# Altium PCB PCB1.PcbDoc
Units mil, origin at the board's own origin, x right, y up, seen from the top; angles counter-clockwise.
Board outline 6000 x 4011.54 mil, 2 copper layers (Top Layer, Bottom Layer); 32 components, 36 nets, 174 pads, 38 vias.
Unrouted connection lines stored in the file: 20.
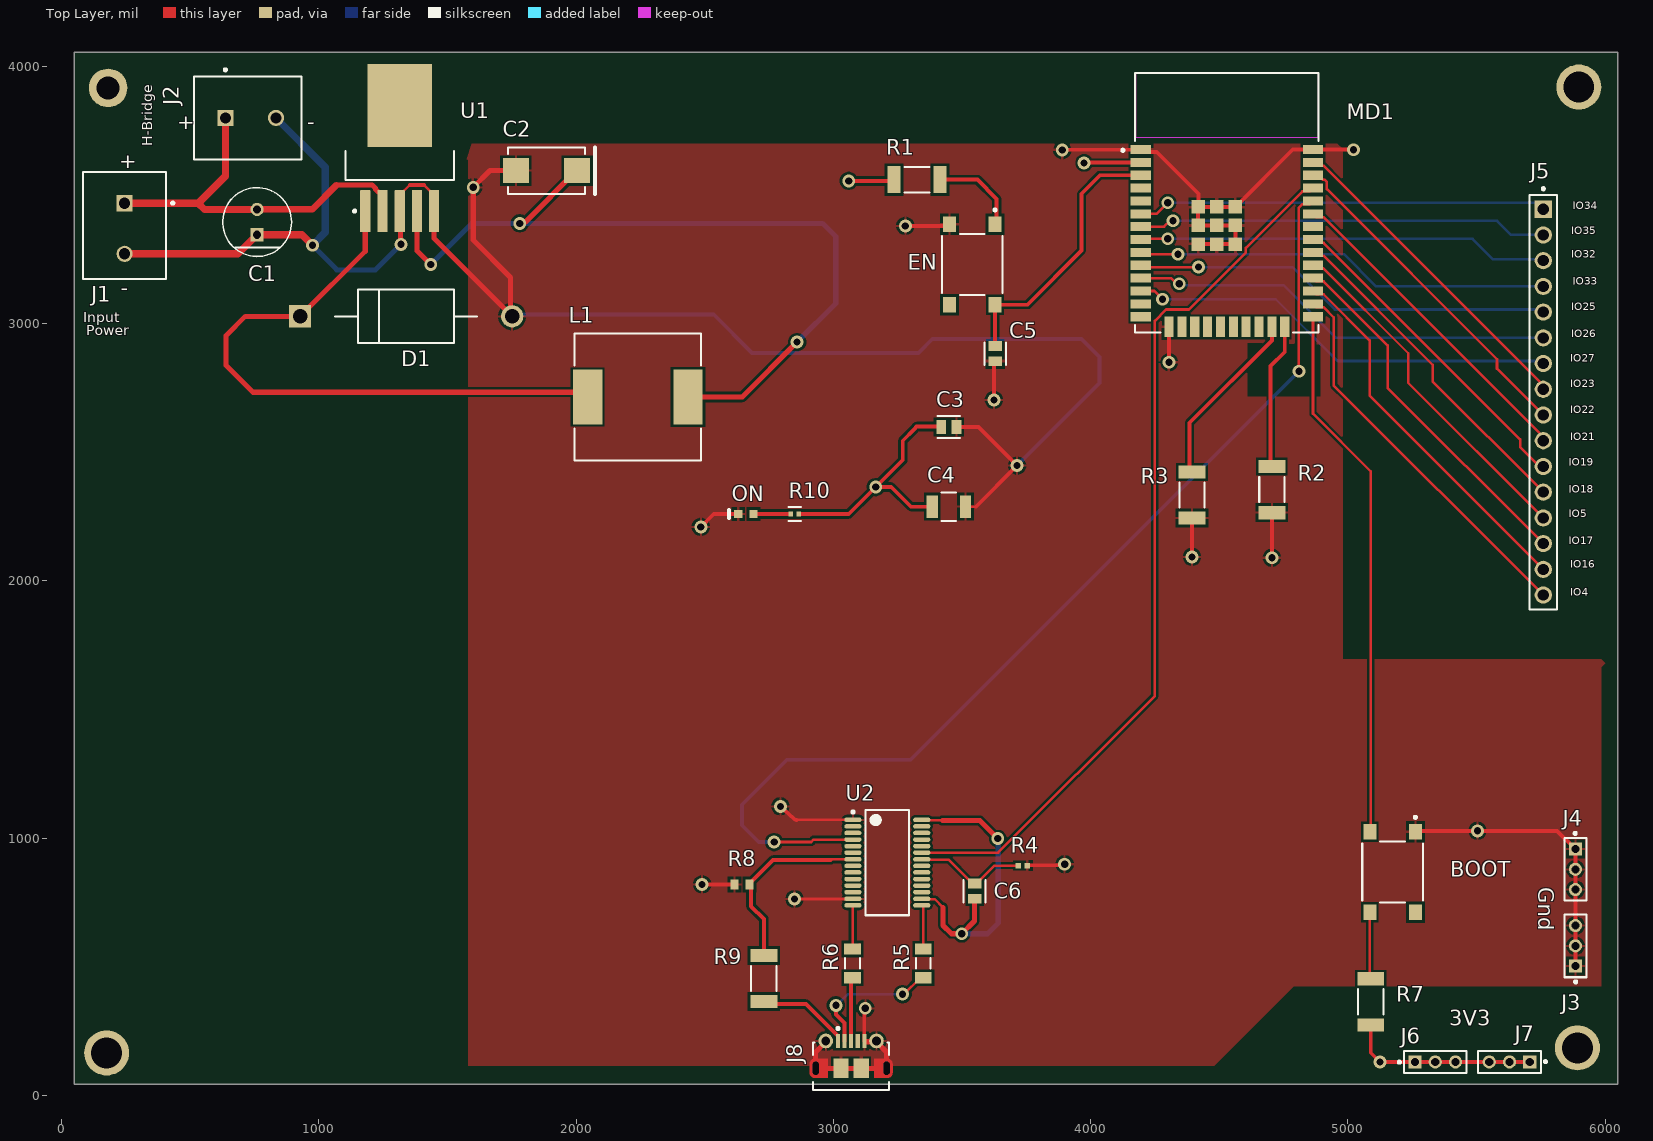
[diagram p0: Top Layer view]
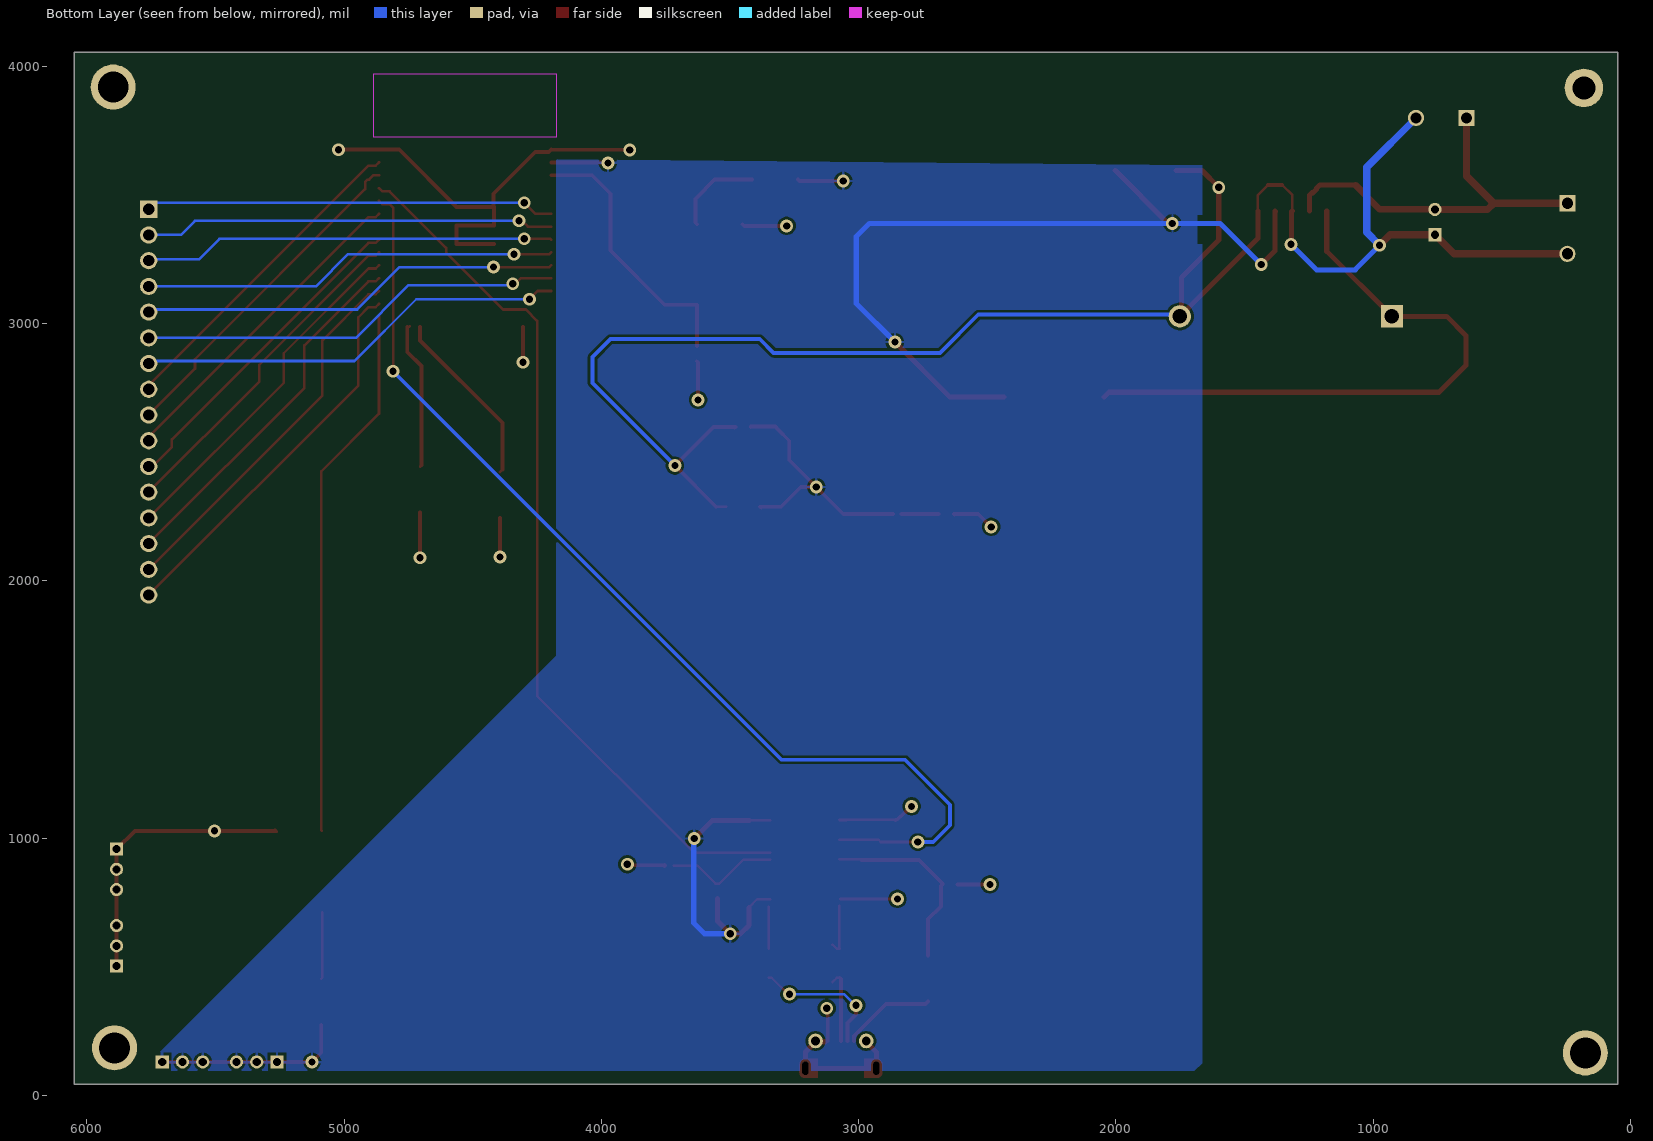
[diagram p1: Bottom Layer view, seen from below]
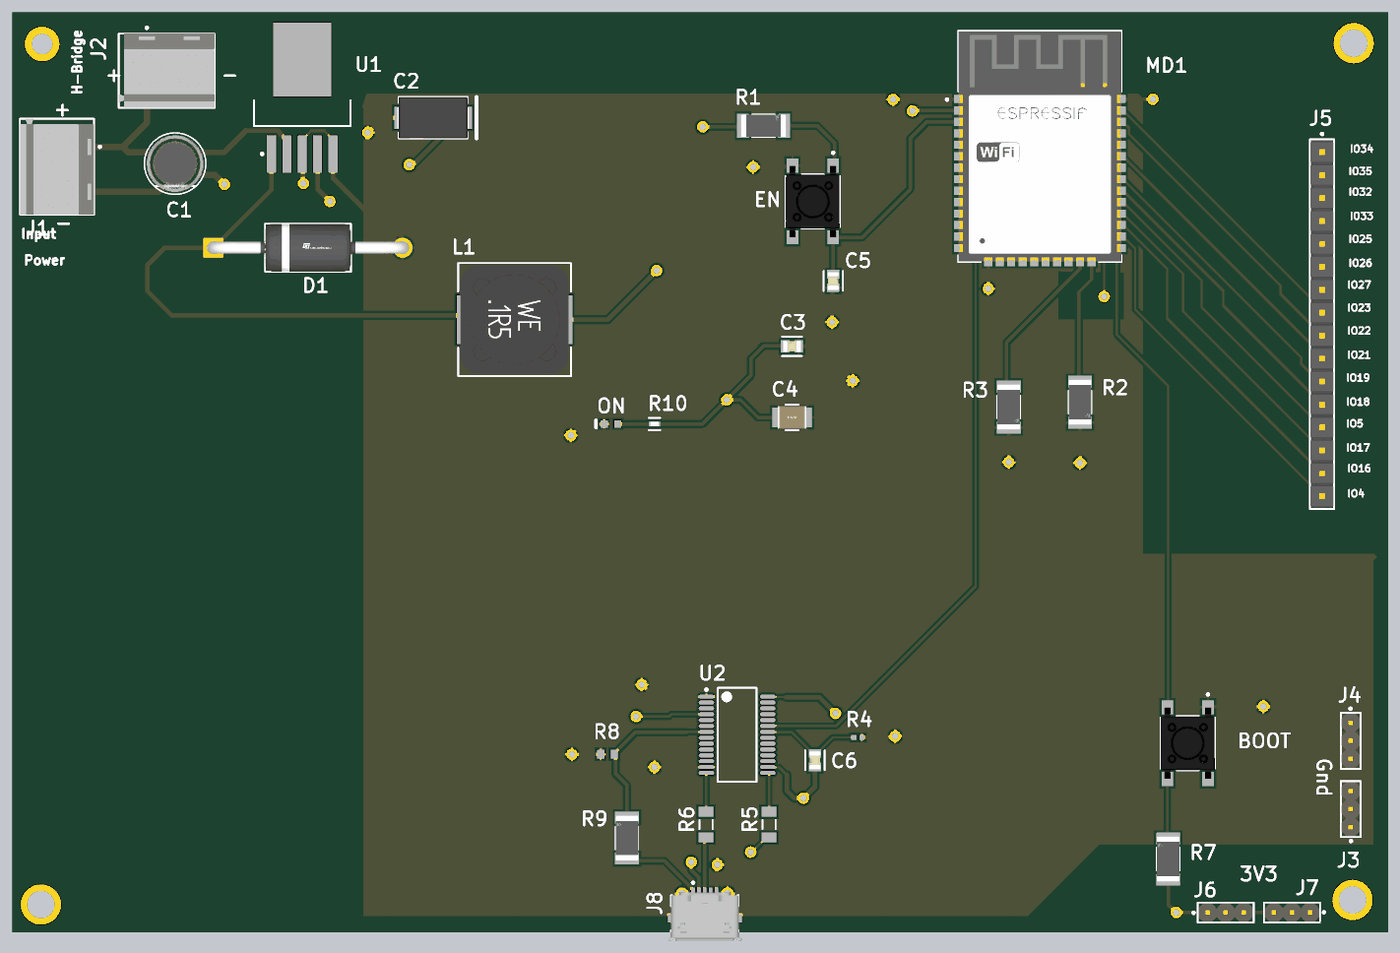
[diagram p2: 3D render of the assembled board from above, using the file's embedded part models]

## Layer stack, top to bottom
Top Solder: solder mask 0.4, Solder Resist, Dk 3.5
Top Layer: signal copper 1.4
Dielectric 1: dielectric 12.6, FR-4, Dk 4.8
Bottom Layer: signal copper 1.4
Bottom Solder: solder mask 0.4, Solder Resist, Dk 3.5

## Board outline
49.32,43.46 6049.32,43.46 6049.32,4055 49.32,4055

## Design rules (kind name [scope] priority, off if disabled: settings)
Clearance [All] p1: gap=10 ignorepadtopadclearanceinfootprint=TRUE except(0: Arc-Hole Track-Hole SMDPad-Hole THPad-Hole Via-Hole Fill-Hole Poly-Hole Region-Hole Text-Hole)
HoleSize [All] p1: absolutevalues=TRUE maxlimit=150 minlimit=1 maxpercent=80.000 minpercent=20.000
MinimumSolderMaskSliver [All] p1: minsoldermaskwidth=1
PolygonConnect [All] p1: connectstyle=Relief reliefconductorwidth=10 reliefentries=4 polygonreliefangle="90 Angle" airgapwidth=10
RoutingVias [All] p1: holewidth=28 width=50 viastyle="Through Hole" minholewidth=28 minwidth=50 maxholewidth=28 maxwidth=50
SilkToSolderMaskClearance [IsPad] p1: minsilkscreentomaskgap=5 clearancetoexposedcopper=TRUE
SolderMaskExpansion [All] p1: expansion=4 istentingtop=FALSE
Width [All] p1: maxlimit=30 minlimit=10 preferedwidth=10
27 further rules are at their usual default settings.

## Classes and differential pairs
component class Schematic_Capstone: BOOT C1 C2 C3 C4 C5 C6 D1 EN J1 J4 J5 J6 J7 J8 L1 MD1 ON R1 R2 R3 R4 R5 R6 R7 R8 R9 R10 U1 U2

## Components (designator, comment, footprint, x,y, rotation, side; value= is the part's Value field where it differs from the comment)
BOOT "PTS645SM43SMTR92LFS" FP-PTS645SM43SMTR92LFS-MFG 5174.32,868.46 r270 top
C1 "220 uF" FP-860010473011-MFG 760,3395 r90 top
C2 "100 uF" VISH-7343-31_N 1885,3595 r180 top
C3 "100 nF" FP-C0805C-DN-MFG 3449.32,2598.46 r0 top value="0.10 μF"
C4 "10 uF" FP-C3225-250-0_45-MFG 3449.32,2288.46 r0 top
C5 "100 nF" FP-C0805C-DN-MFG 3629.32,2883.46 r270 top value="0.10 μF"
C6 "100 nF" FP-C0805C-DN-MFG 3549.32,793.94 r90 top value="0.10 μF"
D1 "1N5822" FP-DO-201AD-MFG 1339.32,3028.46 r0 top
EN "PTS645SM43SMTR92LFS" FP-PTS645SM43SMTR92LFS-MFG 3540,3230 r270 top
J1 "282836-2" TECO-282836-2_V 245,3370 r270 top
J2 "282836-2" TECO-282836-2_V 735,3800 r0 top
J3 "951103-8622-AR" FP-951103-8622-AR-MFG 5885,581.26 r90 top
J4 "951103-8622-AR" FP-951103-8622-AR-MFG 5885,878.74 r270 top
J5 "61301611121" FP-61301611121-MFG 5760,2695 r270 top
J6 "951103-8622-AR" FP-951103-8622-AR-MFG 5340,130 r0 top
J7 "951103-8622-AR" FP-951103-8622-AR-MFG 5628.74,130 r180 top
J8 "105017-0001" USB-MICRO-B_V 3069.32,158.46 r0 top
L1 "68 uH" WE-PD-L 2240,2715 r0 top
MD1 "ESP32-WROOM-32D" FP-ESP32-WROOM-32D-MFG 4530,3470 r0 top
ON "HSMH-C190" AVAG-HSMX-C190_V 2660,2260 r180 top (schematic designator DS1)
R1 "10 K" FP-CRCW2010-e3-IPC_B 3325,3560 r0 top
R2 "10K" FP-CRCW2010-e3-IPC_B 4705,2355 r270 top
R3 "10K" FP-CRCW2010-e3-IPC_B 4394.32,2333.86 r270 top
R4 "1K" RESC1005X40X25NL05T05 3736.6,893.46 r0 top
R5 "27 R" RESC3216X70X50NL05T20 3349.32,513.46 r90 top
R6 "27 R" RESC3216X70X50NL05T20 3074.32,513.46 r270 top
R7 "10 K" FP-CRCW2010-e3-IPC_B 5089.32,363.46 r90 top
R8 "20 K" RESC1608X55X25ML10T15 2645,820 r180 top
R9 "10 K" FP-CRCW2010-e3-IPC_B 2730,454.61 r90 top
R10 "100 R" FP-CRCW0402-e3-IPC_C 2850,2260 r0 top
U1 "LM2595S-3.3/NOPB" KTT0005B_N 1314.32,3683.46 r90 top
U2 "CY7C64225-28PVXC" CYP-PVX28_L 3210,905 r0 top

## Footprints (in the part's own frame and the unit in brackets; to place one, negate y for a bottom-side part, rotate by r counter-clockwise, add the part's x,y. Pads: shape width x height; smd on the part's side, far side on the other; paste and mask are expansions set on the pad)
AVAG-HSMX-C190_V [mm] "SMD, 2-Leads, Body 1.6x0.8mm, Height 0.9mm"
  rect 0.8x0.8 smd: 1(-0.75,0) 2(0.75,0)
  silkscreen extent 1.65,-0.4 1.65,0.4, body extent -0.8,-0.4 0.8,0.4, height 0.9
CYP-PVX28_L [mm] "SOP, 28-Leads, Body 10.2x5.3mm, Pitch 0.65mm, IPC High Density"
  oval 1.7x0.45 smd: 1(-3.4,4.225) 2(-3.4,3.575) 3(-3.4,2.925) 4(-3.4,2.275) 5(-3.4,1.625) 6(-3.4,0.975) 7(-3.4,0.325) 8(-3.4,-0.325) 9(-3.4,-0.975) 10(-3.4,-1.625) 11(-3.4,-2.275) 12(-3.4,-2.925) 13(-3.4,-3.575) 14(-3.4,-4.225) 15(3.4,-4.225) 16(3.4,-3.575) 17(3.4,-2.925) 18(3.4,-2.275) 19(3.4,-1.625) 20(3.4,-0.975) 21(3.4,-0.325) 22(3.4,0.325) 23(3.4,0.975) 24(3.4,1.625) 25(3.4,2.275) 26(3.4,2.925) 27(3.4,3.575) 28(3.4,4.225)
  silkscreen extent -3.52,-5.2 2.15,5.2, body extent -2.8,-5.2 2.8,5.2, height 2
FP-951103-8622-AR-MFG [mm]
  rect 1.3x1.3 hole 0.8 paste-1000 mask+0: 1(-2,0)
  round 1.3 hole 0.8 paste-1000 mask+0: 2(0,0) 3(2,0)
  silkscreen extent -3.67,-1.1 3.1,1.1, body extent -3.2,-1.2 3.2,1.2, height 0.25
FP-61301611121-MFG [mm]
  rect 1.7x1.7 hole 1.1 paste-1000 mask+0: 1(-19.05,0)
  round 1.7 hole 1.1 paste-1000 mask+0: 2(-16.51,0) 3(-13.97,0) 4(-11.43,0) 5(-8.89,0) 6(-6.35,0) 7(-3.81,0) 8(-1.27,0) 9(1.27,0) 10(3.81,0) 11(6.35,0) 12(8.89,0) 13(11.43,0) 14(13.97,0) 15(16.51,0) 16(19.05,0)
  silkscreen extent -21.19,-1.35 20.47,1.35, body extent -20.57,-1.45 20.57,1.45, height 0.25
FP-860010473011-MFG [mm]
  rect 1.3x1.3 hole 0.8 paste-1000 mask+0: 1(-1.25,0)
  round 1.3 hole 0.8 paste-1000 mask+0: 2(1.25,0)
  silkscreen extent -3.4,-3.4 3.4,3.4, body extent -3.5,-3.5 3.5,3.5, height 0.25
FP-C0805C-DN-MFG [mm]
  rect 0.95x1.35 smd paste+0 mask+0: 1(-0.75,0) 2(0.75,0)
  silkscreen extent -1.1,-1.07 1.1,1.07, body extent -1.4,-0.85 1.4,0.85, height 0.25
FP-C3225-250-0_45-MFG [mm]
  rect 1.1x2.2 smd paste+0 mask+0: 1(-1.65,0) 2(1.65,0)
  silkscreen extent -0.72,-1.43 0.72,1.43, body extent -2.3,-1.53 2.3,1.53, height 0.25
FP-CRCW0402-e3-IPC_C [mil]
  rect 18.43x18.6 smd paste+0 mask+0: 1(-15.83,0) 2(15.83,0)
  silkscreen extent -25,-27 25,27, body extent -29,-15 29,15, height 10
FP-CRCW2010-e3-IPC_B [mil]
  rect 51.42x104.65 smd paste+0 mask+0: 1(-89.61,0) 2(89.61,0)
  silkscreen extent -49,-49 49,49, body extent -125,-62 125,62, height 10
FP-DO-201AD-MFG [mm]
  rect 2.2x2.2 hole 1.45 paste-1000 mask+0: 1(-10.47,0)
  round 2.2 hole 1.45 paste-1000 mask+0: 2(10.47,0)
  silkscreen extent -7,-2.65 7,2.65, body extent -11.67,-2.75 11.67,2.75, height 0.25
FP-ESP32-WROOM-32D-MFG [mm]
  rect 2x0.9 smd paste+0 mask+0: 1(-8.5,5.26) 2(-8.5,3.99) 3(-8.5,2.72) 4(-8.5,1.45) 5(-8.5,0.18) 6(-8.5,-1.09) 7(-8.5,-2.36) 8(-8.5,-3.63) 9(-8.5,-4.9) 10(-8.5,-6.17) 11(-8.5,-7.44) 12(-8.5,-8.71) 13(-8.5,-9.98) 14(-8.5,-11.25) 25(8.5,-11.25) 26(8.5,-9.98) 27(8.5,-8.71) 28(8.5,-7.44) 29(8.5,-6.17) 30(8.5,-4.9) 31(8.5,-3.63) 32(8.5,-2.36) 33(8.5,-1.09) 34(8.5,0.18) 35(8.5,1.45) 36(8.5,2.72) 37(8.5,3.99) 38(8.5,5.26)
  rect 0.9x2 smd paste+0 mask+0: 15(-5.715,-12.25) 16(-4.445,-12.25) 17(-3.175,-12.25) 18(-1.905,-12.25) 19(-0.635,-12.25) 20(0.635,-12.25) 21(1.905,-12.25) 22(3.175,-12.25) 23(4.445,-12.25) 24(5.715,-12.25)
  rect 1.33x1.33 smd paste+0 mask+0: 39(-2.835,-4.075) 39(-2.835,-2.24) 39(-2.835,-0.405) 39(-1,-4.075) 39(-1,-2.24) 39(-1,-0.405) 39(0.835,-4.075) 39(0.835,-2.24) 39(0.835,-0.405)
  Keep-Out Layer region: -9,6.45 9,6.45 9,12.75 -9,12.75
  Keep-Out Layer region: -9,6.45 9,6.45 9,12.75 -9,12.75
  silkscreen extent -10.4,-12.8 9.05,12.8, body extent -9.6,-13.35 9.6,12.9, height 0.25
FP-PTS645SM43SMTR92LFS-MFG [mm]
  rect 1.55x1.3 smd paste+0 mask+0: 1(-3.975,2.25) 2(3.975,2.25) 3(-3.975,-2.25) 4(3.975,-2.25)
  silkscreen extent -5.52,-3 3,3, body extent -4.85,-3.1 4.85,3.1, height 0.25
KTT0005B_N [mm] "DPAK, 5-Leads, Body 10.65x9.65mm, Pitch 1.7mm, IPC Medium Density"
  rrect10% 4.15x1 smd: 1(-6.25,3.4) 2(-6.25,1.7) 3(-6.25,0) 4(-6.25,-1.7) 5(-6.25,-3.4)
  rrect2% 8.2x6.4 smd: 6(4.2,0)
  silkscreen extent -6.37,-5.35 -0.3,5.35, body extent -3.15,-5.32 6.5,5.33, height 4.83
RESC1005X40X25NL05T05 [mm] "Chip Resistor, 2-Leads, Body 1.00x0.50mm, IPC Medium Density"
  rect 0.55x0.55 smd: 1(-0.45,0) 2(0.45,0)
  body extent -0.53,-0.27 0.53,0.28, height 0.4
RESC1608X55X25ML10T15 [mm] "Chip Resistor, 2-Leads, Body 1.60x0.80mm, IPC Low Density"
  rect 0.8x1 smd: 1(-0.75,0) 2(0.75,0)
  body extent -0.85,-0.45 0.85,0.45, height 0.55
RESC3216X70X50NL05T20 [mm] "Chip Resistor, 2-Leads, Body 3.20x1.60mm, IPC Medium Density"
  rect 1.1x1.65 smd: 1(-1.425,0) 2(1.425,0)
  silkscreen extent -0.5,-0.72 0.5,0.72, body extent -1.63,-0.82 1.62,0.82, height 0.7
TECO-282836-2_V [mm] "Female Header, Pitch 5mm, 1 x 2 Position, Height 10mm"
  rect 1.6x1.6 hole 1.1: 1(-2.5,0)
  round 1.6 hole 1.1: 2(2.5,0)
  silkscreen extent -5.6,-4.1 5,4.88, body extent -5.6,-4.1 5,4.1, height 10
USB-MICRO-B_V [mm] "USB, MICRO B, Body 7.491x4.695 mm, Pitch 0.65 mm"
  rect 0.4x1.35 smd: 1(-1.3,1.35) 2(-0.65,1.35) 3(0,1.35) 4(0.65,1.35) 5(1.3,1.35)
  round 1.45 hole 0.85: 6(-2.5,1.35) 7(2.5,1.35)
  rrect50% 0x0 hole 0.6 slot 1.3 at 90 deg: 8(-3.5,-1.35) 11(3.5,-1.35)
  rect 1.5x1.9 smd: 9(-1,-1.35) 10(1,-1.35)
  Top Layer circle w0.5: c3.6,-1.8 r0.25
  Top Layer circle w0.5: c-3.6,-1.8 r0.25
  Top Layer region: 3.6,-0.9 3.6,-1.8 4.1,-1.8 4.1,-0.9
  Top Layer region: 2.3,-0.4 2.3,-2.3 3.6,-2.3 3.6,-0.4
  Top Layer region: -2.3,-2.3 -2.3,-0.4 -3.6,-0.4 -3.6,-2.3
  Top Layer region: -3.6,-1.8 -3.6,-0.9 -4.1,-0.9 -4.1,-1.8
  Top Layer lines w0.5: -3.6,-0.65 cw(c-3.6,-0.9) -3.5,-0.671 cw(c-3.6,-0.9) -3.5,-1.129 cw(c-3.6,-0.9) -3.6,-0.65 ; 3.5,-1.129 cw(c3.6,-0.9) 3.5,-0.671 cw(c3.6,-0.9) 3.6,-0.65 cw(c3.6,-0.9) 3.5,-1.129
  silkscreen extent -3.75,-3.5 3.75,2.7, body extent -4.1,-3.9 4.1,1.5, height 2.67
VISH-7343-31_N [mm] "Molded Capacitor, 2-Leads, Body 7.6x4.6mm, IPC Medium Density"
  rect 2.55x2.45 smd: 1(-3.025,0) 2(3.025,0)
  silkscreen extent -4.8,-2.3 3.8,2.3, body extent -4.02,-2.3 4.02,2.3, height 3.1
WE-PD-L [mm] "SMD Inductor, 2-Leads, Body 12.0 x 12.0 mm"
  rect 2.9x5.4 smd: 1(-4.95,0) 2(4.95,0)
  silkscreen extent -6.25,-6.25 6.25,6.25, body extent -6,-6 6,6, height 5.98

## Part data
BOOT EN: library part CMP-2000-05160-2, "SWITCH TACTILE SPST-NO 0.05A 12V", Case/Package=SMD/SMT, Color=Black, Contact Resistance=100mR, Current Rating=50mA, Max Operating Temperature=60°C, Max Voltage Rating (DC)=12V, Min Operating Temperature=-20°C, Operating Force=160gf, Package Quantity=1, Actuator Length=0.85mm, Actuator Material=Nylon, Actuator Type=Standard, Contact Material=Silver, Contact Plating=Silver, Depth=9mm, Illumination Type=Non-Illuminated, Lead Free="Lead Free", Length=6mm, Max Current Rating=50mA, Mechanical Life=100000Cycles, Mount="Surface Mount", Orientation=Straight, Packaging="Tape and Reel", REACH SVHC="No SVHC", Switch Function=Off-Mom, Termination="Gull Wing", Throw Configuration=SPST, Voltage Rating (DC)=12V
C1: library part CMP-207834-000007-1, "CAP 220 UF 20% 25 V", Capacitance=220uF, Case/Package=Radial, Max Operating Temperature=85°C, Min Operating Temperature=-40°C, Package Quantity=1500, Ripple Current=310mA, Tolerance=20%, Voltage Rating=25V, Diameter=6.3mm, Height=11mm, Height - Seated (Max)=0.492inch, Lead Pitch=0.098inch, Life (Hours)=2000Hour, Material=Aluminium, Mount="Through Hole", Packaging="Tape and Reel", Polarity=Polar, RoHS Compliant=Yes, Series=WCAP-ATG8, Voltage Rating (DC)=25V
C2: library part CMP-1666-00024-1, "Solid Tantalum Chip Capacitor, 100 uF, +/- 10%, 10 V, -55 to 125 degC, 2917 (7343 Metric), RoHS, Tape and Reel", Case Code (Imperial)=0603, Case Code (Metric)=1608, Max Operating Temperature="155 degC", Min Operating Temperature="-55 degC", Package Quantity=200, Power Rating="100 mW", Resistance="1.2 kohm", Tolerance=1%, Voltage Rating="50 V", Case\Package=0603, ComponentLink1Description="Manufacturer URL", ComponentLink1URL=http://www.vishay.com/, ComponentLink2Description=Datasheet, ComponentLink2URL=http://www.vishay.com/docs/40002/293d.pdf, DatasheetVersion=Aug-16, Height="0.45 mm", Length="1.6 mm", Mount="Surface Mount", PackageDescription="2-Pin Surface Mount Device, Body 7.3 x 4.3 mm", PackageReference=7343-31, Packaging="Tape and Reel", Pins=2, REACH SVHC="No SVHC", RoHSCompliant=true, Voltage Rating (DC)="50 V", Width="0.8 mm"
C3 C5 C6: library part CMP-2007-00279-2, "CAP CER 0.1UF 50V X7R 0805", Capacitance="0.10 μF", Manufacturer=KEMET, Manufacturer Part Number=C0805C104K5RACTU, Package=C0805C-DN, Temperature="-55°C to +125°C", Temperature Characteristic=X7R, Temperature Coefficient=30ppm/°C, Temperature Range High=+125°C, Temperature Range Low=-55°C, Tolerance=0.1, Voltage Rating="50 V", Automotive=No, Category=Cap, ComponentLink2Description=Datasheet, ComponentLink2URL=https://content.kemet.com/datasheets/KEM_C1003_C0G_SMD.pdf, Device Class L1="Passive Components", Device Class L2=Capacitors, Device Class L3="Ceramic Capacitors", Digikey Description="CAP CER 0.1UF 50V X7R 0805", Height=0.88mm, Ipc Land Pattern Name=CAPC200125X78, Lead Free=Yes, Material=Ceramic, Mouser Description="Cap Ceramic 0.1uF 50V X7R 10% SMD 2.0 x 1.2 mm 125 C Paper T/R", Octopart=https://octopart.com/c0805c104k5ractu-kemet-143926, RoHS=TRUE
C4: library part CMP-08246-007262-1, "COMMERCIAL GRADE GENERAL PURPOSE"
D1: library part CMP-12187-000025-1, "DIODE SCHOTTKY 40V 3A DO201AD", Forward Current=3A, Manufacturer=STMicroelectronics, Max Junction Temp=+150°C, Max Repetitive Reverse Voltage=40V, Max Surge Forward Current=80A, Package=DO-201AD, Peak Reverse Current=2mA, Temperature="to +150°C", Automotive=No, Category=Diode, ComponentLink2Description=Datasheet, ComponentLink2URL=https://www.st.com/resource/en/datasheet/1n5822.pdf, Device Class L1="Discrete Semiconductors", Device Class L2=Diodes, Device Class L3="Schottky Diodes", Digikey Description="DIODE SCHOTTKY 40V 3A DO201AD", Height=5.3mm, Lead Free=Yes, Manufacturer Part Number=1N5822, Mouser Description="Schottky Diodes & Rectifiers Vr/40V Io/3A BULK", Octopart=https://octopart.com/1n5822-stmicroelectronics-323225, RoHS=TRUE, Temperature Range High=+150°C
J1 J2: library part CMP-1684-00017-1, "Female Header, Pitch 5 mm, 1 x 2 Position, Height 10 mm, Tail Length 3.5 mm, Rohs, Bulk", Color=Green, Current=13.5A, Manufacturer="TE Connectivity", Package Description="Female Header, Pitch 5 mm, 1 x 2 Position, Height 10 mm, Tail Length 3.5 mm", Package Reference=THD, Standard Package=300, Voltage=300V, 3D Model=282836-2.pdf, Category=Connectors,Interconnects, Clamp Material - Plating=Brass-NickelPlated, Contact Material - Plating=Brass-TinPlated, Datasheet URL=http://www.te.com.cn/commerce/DocumentDelivery/DDEController?Action=showdoc&DocId=Catalog+Section%7F1308389_EUROSTYLE_TERMINAL_BLOCKS%7F0607%7Fpdf%7FEnglish%7FENG_CS_1308389_EUROSTYLE_TERMINAL_BLOCKS_0607.pdf%7F282836-2, Dynamic Catalog=BuchananSeries, Family=TerminalBlocks-WiretoBoard, Featured Product=EurostyleTerminalBlockConnectors, Features=Interlocking(Side), Housing Material=Polyamide(PA66),Nylon6/6, Manufacturer URL=http://www.te.com, Mating Orientation=HorizontalwithBoard, Mounting Type=ThroughHole, Number of Levels=1, Other Names="5ULV-02B / A98076", Packaging=Bulk, Pitch="0.197\"(5.00mm)", Positions Per Level=2, Product Training Modules=Wire-to-BoardEurostyleTerminalBlocks, RoHS Information=282836-2StatementofCompliance, Screw Material - Plating=Brass-NickelPlated, Screw Thread=M3, Series=Buchanan, Torque - Screw=0.68Nm(6Lb-In), Wire Gauge=16-30AWG, Wire Termination=Screw-RisingCageClamp
J3 J4 J6 J7: library part CMP-05379-000003-1, "CONN HEADER VERT 3POS 2MM", Current Rating=2A, Manufacturer=3M, Temperature="-55°C to +125°C", Temperature Range High=+125°C, Temperature Range Low=-55°C, Automotive=No, Category=Conn, ComponentLink2Description=Datasheet, ComponentLink2URL=http://multimedia.3m.com/mws/media/1400506O/3m-pin-strip-header-951-series-78-5100-2653-3.pdf, Conn Gender=Male, Conn Orientation=Straight, Contact Material=Gold,Nickel, Device Class L1=Connectors, Device Class L2="Headers and Wire Housings", Device Class L3=unset, Digikey Description="CONN HEADER VERT 3POS 2MM", Height=6.3mm, Lead Free=Yes, Manufacturer Part Number=951103-8622-AR, Mouser Description="Header; PinStrip; CopperAlloy; HighTempThermoplastic; 3Cnts; 1A; RtAngle; 951Series", Number of Contacts=3, Number of Rows=1, Octopart=https://octopart.com/951103-8622-ar-3m-14400669, Package=951103-8622-AR, Pitch=2mm, RoHS=TRUE
J5: library part CMP-1502-01095-2, "CONN HEADER VERT 16POS 2.54MM", Color=Black, Flammability Rating="UL94 V-0", Max Operating Temperature=105°C, Min Operating Temperature=-40°C, Voltage Rating=250V, Connector Type=Header, Contact Finish - Mating=GOLD, Contact Material="Copper Alloy", Contact Mating Length=0.236inch, Contact Plating=Gold, Contact Shape=Square, Contact Type="Male Pin", Fastening Type=Pull, Gender=Male, Insulation Color=Black, Insulation Material=Nylon, Mount="Through Hole", Number of Contacts=16, Number of Positions=16, Number of Rows=1, Packaging=Bulk, Pitch=0.1inch, RoHS Compliant=Yes, Series=WR-PHD, Termination=Solder
J8: library part CMP-2000-05827-1, "Micro-USB B Receptacle, Right Angle, Bottom Mount, Surface Mount, with Solder Tabs, -30 to 85 degC, 5-Pin USB, RoHS, Tape and Reel", Manufacturer=Molex, Package Description="5-Leads USB, Micro B, Body 7.5 x 5 mm, Pitch 0.65 mm", Package Reference=MICRO-B, Package Version="Rev. F, 12/2012", Standard Package=1, Voltage - Max=30V, 3D Model=105017-0001.stp, Catalog Drawings=1050170001, Category=Connectors,Interconnects, Circuits=5, Connector Type=USB-microB, Datasheet URL=http://www.molex.com/elqNow/elqRedir.htm?ref=http://www.molex.com/webdocs/datasheets/pdf/en-us/1050170001_IO_CONNECTORS.pdf, Datasheet Version=03/2016, Family=USB,DVI,HDMIConnectors, Featured Product=Micro-USBConnectorsUSBConnectors, Features=Shielded,SolderRetention, Gender=Receptacle, Ingress Protection=-, Manufacturer URL=http://www.molex.com/, Mating Products=WM17145-ND-CABLEMICROUSBBTOSTDA1.0MWM17147-ND-CABLEMICROUSBBTOSTDA2.0MWM17146-ND-CABLEMICROUSBBTOSTDA1.5M, Mounting Technology=SurfaceMount, Mounting Type=BoardCutout,SurfaceMount,RightAngle, Number of Contacts=5, Online Catalog=Molex-MicroUSB, Other Names=WM1399DKR, Package URL=http://www.molex.com/pdm_docs/sd/1050170001_sd.pdf, Packaging=Digi-Reel®, PCN Assembly/Origin=ResinSupplier21/Oct/2015, RoHS Information=1050170001CertofCompliance, Series=-, Specifications=-
L1: library part CMP-0227-00736-1, "SMD-Shielded Power Inductor WE-PD, L = 68.0 µH", Inductance="68.0 ÂµH", ComponentLink1Description="Manufacturer Link", ComponentLink1URL=http://www.we-online.com, ComponentLink2Description=Datasheet, ComponentLink2URL=http://www.we-online.de/katalog/media/pdf/744771168.pdf, DatasheetVersion="ver 6, Jun-2005", PackageDescription="SMD Inductor, 2-Leads, Body 12.0 x 12.0 mm", PackageReference=WE-PD-L, PackageVersion=2006
MD1: library part CMP-194065-000003-1, "WIFI MODULE 32MBITS SPI FLASH", Manufacturer="Espressif Systems", Max Frequency=2484MHz, Max Supply Voltage=3.6V, Min Supply Voltage=3V, Nominal Supply Current=500mA, Temperature="-40°C to +85°C", Temperature Range High=+85°C, Temperature Range Low=-40°C, Automotive=No, Bandwidth=72MHz, Category=UNK, ComponentLink2Description=Datasheet, ComponentLink2URL=https://www.espressif.com/sites/default/files/documentation/esp32-wroom-32d_esp32-wroom-32u_datasheet_en.pdf, Data Rate=150Mbits/s, Device Class L1="Integrated Circuits (ICs)", Device Class L2="RF Semiconductors and Devices", Device Class L3=Transceivers, Digikey Description="WIFI MODULE 32MBITS SPI FLASH", Height=3.2mm, Interface=I2C,SPI,UART,Ethernet,I2S,Other, Lead Free=Yes, Manufacturer Part Number=ESP32-WROOM-32D, Mouser Description="Wi-Fi/BT BLE Module ESP32-D0WD, SPI Flash, UART, P", Number Of Adc Channels=16, Number Of Gpio=32, Octopart=https://octopart.com/esp32-wroom-32d-espressif+systems-91040050, Package=ESP32-WROOM-32D, RoHS=TRUE, Sensitivity=-98dBm
ON: library part CMP-1744-00004-1, "LED Uni-Color Red, 65 mW, 20 mA, -40 to 85 degC, 2-Pin SMD, RoHS, Tape and Reel", Current Rating="1 A", Max Operating Temperature="85 degC", Min Operating Temperature="-30 degC", Package Quantity=2000, ComponentLink1Description="Manufacturer URL", ComponentLink1URL=http://www.avagotech.com/, ComponentLink2Description=Datasheet, ComponentLink2URL=http://docs.avagotech.com/docs/AV02-0551EN, ComponentLink3Description="Package Specification", ComponentLink3URL=http://www.fairchildsemi.com/dwg/MA/MA03D.pdf, Connector Type=USB, Contact Material=Copper, Contact Plating=Gold, DatasheetVersion=Mar-12, Gender=Male, Height="2.8 mm", Lead Pitch="0.65 mm", Length="7.5 mm", Mount="Surface Mount", PackageDescription="2-Pin Surface Mount Device, Body 1.6 x 0.8 mm, Height 0.9 mm", PackageReference=HSMX-C190, Packaging="Tape and Reel", Pins=5, REACH SVHC="No SVHC", RoHSCompliant=true, Width="5.6 mm"
R1 R2 R3 R7 R9: library part CMP-1017-00623-2, "RES Thick Film, 10kΩ, 1%, 0.75W, 100ppm/°C, 2010", Case Code (Imperial)=2010, Case Code (Metric)=5025, Max Operating Temperature=155°C, Min Operating Temperature=-55°C, Package Quantity=4000, Power Rating=750mW, Resistance=10kR, Temperature Coefficient=100ppm/°C, Tolerance=1%, Voltage Rating=400V, Case/Package=2010, Composition="Thick Film", Contact Plating=Tin, Depth=2.5mm, Height=0.6mm, Lead Free="Lead Free", Length=5mm, Military Standard=Not, Packaging="Tape and Reel", Radiation Hardening=No, Termination=SMD/SMT, Voltage Rating (DC)=400V, Weight=0.000899oz, Width=2.5mm
R4: library part CMP-2002-00432-1, Manufacturer=Panasonic, Part Number=ERJ-2GEJ102X
R5 R6: library part CMP-2003-00830-1, Manufacturer=Panasonic, Part Number=ERJ8ENF27R0V
R8: library part CMP-2000-04177-1, Manufacturer=Yageo, Part Number=RC0603FR-1020KL
R10: library part CMP-1011-00397-3, "RES Thick Film, 100Ω, 1%, 0.063W, 100ppm/°C, 0402", Case Code (Imperial)=0402, Case Code (Metric)=1005, Max Operating Temperature=155°C, Max Power Dissipation=63mW, Min Operating Temperature=-55°C, Package Quantity=10, Resistance=100R, Temperature Coefficient=100ppm/°C, Tolerance=1%, Voltage Rating=50V, Case/Package=0402, Composition="Thick Film", Contact Plating=Tin, Depth=0.5mm, Features="Automotive AEC-Q200", Height=0.35mm, Lead Free="Lead Free", Length=1mm, Military Standard=Not, Mount="Surface Mount", Number of Terminations=2, Packaging="Tape and Reel", Power Rating=63mW, Radiation Hardening=No, Termination=SMD/SMT, Voltage Rating (DC)=50V, Weight=2.3E-05oz, Width=0.02inch, Working Voltage=50V
U1: library part CMP-0069-00229-3, "SIMPLE SWITCHER® Power Converter 150 KHz 1A Step-Down Voltage Regulator, 5-pin TO-263, Pb-Free", Manufacturer="Texas Instruments", PackageTopMarking="NSUZXYTTE#*LM2595S*-3.3 P+", PowerWise=N, Code_JEDEC=MO-169-AB, ComponentLink1Description="Datasheet URL", ComponentLink1URL=http://www.ti.com/general/docs/lit/getliterature.tsp?genericPartNumber=LM2595&fileType=pdf, CompType=Switcher, PackageDescription="TO-263, Molded, .400 x .390 x .180in, 5 Lead, .067in Pitch, Surface Mount", PackageReference=KTT0005B, PinCount=5, RoHS=Y
U2: library part CMP-0967-00143-1, "USB-to-UART Bridge Controller, 3 to 5.25 V, 0 to 70 degC, 28-Pin SSOP (PVX28), Tube", Manufacturer=Cypress, Max. Operating Temp. (degreesC)=70, Max. Operating Voltage (V)=5.25, Min. Operating Temp. (degreesC)=0, Min. Operating Voltage (V)=3, ComponentLink1Description="Manufacturer URL", ComponentLink1URL=http://www.cypress.com/, ComponentLink2Description=Datasheet, ComponentLink2URL=http://www.cypress.com/?docID=48153, ComponentLink3Description="Package Specification", ComponentLink3URL=http://www.cypress.com/?docID=1371, DatasheetVersion="Rev. *D", Memory Architecture=Flash, Mounting Technology="Surface Mount", PackageDescription="28-Pin Super Small Outline Package, Body 10.2 x 5.3 mm, Pitch 0.65 mm", PackageReference=PVX28, PackageVersion="Rev. *C, 10/2001", Packing=Tube, PartNumber=CY7C64225-28PVXC, RoHS=Pb-Free

## Free pads (board coordinates)
  round 175 hole 120: 9(175,165) 9(5893.02,184.91) 9(5898.02,3919.91)
  round 150 hole 90: 9(180.55,3916.56)

## Via types
v1: diameter 50, hole 28, Top Layer to Bottom Layer, 38 vias

## Nets (pads, with @x,y where several pads share a name; then routed paths per layer and width w, separated by ;. In a path a pad name is that pad's centre, name@x,y a point inside that pad or via, vN(x,y) a via of type N, cw(c..) or ccw(c..) an arc to the next point about the centre after c; other vN are vias at no path point)
3V3: C2.1 C3.1 C4.1 C6.1 J6.1 J6.2 J6.3 J7.1 J7.2 J7.3 L1.2 MD1.2 R1.1 R7.1 R10.2 U1.4 U2.16 U2.28 | length 6553.8
  Top Layer w10: U2.16@3343.17,762.72 3394.32,762.72 3426.82,730.22 ; U2.28@3343.17,1069.8 3422.98,1069.8 3424.32,1068.46 ; C4.1@3379.36,2283.46 C4.1 ; C6.1 C6.1@3554.32,759.41
  Top Layer w15: R10.2 3060,2260 v1(3165,2365) ; v1(3060,3555) 3230.39,3555 R1.1 ; C4.1 3301.54,2288.46 3225,2365 v1(3165,2365) ; C3.1 3418.25,2600 3323.79,2600 3315,2591.21 3315,2590 3270,2545 3270,2470 v1(3165,2365) ; v1(3975,3625) 3976.04,3626.04 4194.31,3626.04 MD1.2 ; R7.1 5089.32,165.68 v1(5125,130) J6.1 J6.2 J6.3 J7.3 J7.2 J7.1
  Top Layer w20: U1.4@1380.28,3436.44 U1.4 1381.25,3283.75 v1(1435,3230) ; v1(1780.85,3390) 1786.59,3395.74 1802.87,3395.74 2002.13,3595 C2.1 ; L1.2 2645.85,2715 v1(2859.32,2928.46) ; 3424.32,1068.46 3569.32,1068.46 v1(3639.32,998.46) ; 3426.82,730.22 3426.82,660.96 3459.32,628.46 v1(3499.32,628.46) 3549.32,678.46 C6.1
  Bottom Layer w20: v1(1435,3230) 1595,3390 v1(1780.85,3390) 2957.78,3390 3009.32,3338.46 3009.32,3078.46 v1(2859.32,2928.46) ; v1(3499.32,628.46) 3599.32,628.46 3641.03,670.18 3641.03,996.75 v1(3639.32,998.46)
D+: R6.1 U2.14 | length 202.4
  Top Layer w10: U2.14@3075.46,737.13 3075.46,570.71 R6.1 3085.14,569.57 R6.1@3101.8,586.22
D-: R5.2 U2.15 | length 164
  Top Layer w10: R5.2 U2.15@3349.32,733.56
En: C5.1 EN.2 MD1.3 | length 1065.6
  Top Layer w15: C5.1 3628.58,2913.73 EN.2 3754.36,3073.5 3965,3284.15 3965,3505 4037.09,3577.09 MD1.3
GND: BOOT.1 C1.1 C2.2 C3.2 C4.2 C5.2 D1.2 EN.3 J1.2 J2.2 J3.1 J3.2 J3.3 J4.1 J4.2 J4.3 J8.5 J8.6 J8.7 J8.8 J8.9 J8.10 J8.11 MD1.1 MD1.15 MD1.38 MD1.39 ON.2 R2.2 R3.2 R4.2 R8.2 U1.3 U1.5 U2.1 U2.13 | length 12370.6
  Top Layer w10: U1.3 1314.32,3499.41 1353.37,3538.46 ; 1409.12,3538.46 1448.17,3499.41 U1.5 ; v1(2849.32,763.46) U2.13@3071.98,763.46 ; 2856.64,1070.79 3047.95,1070.79 3048.16,1070.57 3074.26,1070.57 U2.1@3074.47,1070.79 ; C3.2 C3.2@3483.84,2593.46 ; C4.2 3554.32,2288.46 ; BOOT.1 BOOT.1@5266.4,1028.46 ; BOOT.1@5264.32,1028.46 BOOT.1@5269.32,1033.46
  Top Layer w15: 1353.37,3538.46 1409.12,3538.46 ; v1(2485,2210) 2535,2260 ON.2 ON.2@2627.97,2257.5 ; v1(2490,820) R8.2 ; v1(2794.32,1123.46) 2849.32,1073.46 2856.64,1070.79 ; J8.5 v1@3120.5,338.46 ; v1(3280,3380) 3444.92,3380 EN.3 ; C3.2 3564.32,2598.46 v1(3714.32,2448.46) 3554.32,2288.46 ; v1(3624.32,2703.46) 3624.32,2848.94 C5.2 ; R4.2@3755.3,894.45 v1@3895.3,894.45 ; v1@3890,3676.04 4194.31,3676.04 MD1.1 4204.67,3667.78 4257.22,3667.78 4420,3505 4420,3455.67 MD1.39@4418.39,3454.06 ; v1(4305,2850) MD1.15 ; v1(4394.32,2093.46) R3.2 ; MD1.39@4418.39,3309.57 4490.63,3309.57 4562.87,3309.57 4562.87,3381.81 4490.63,3381.81 4418.39,3381.81 MD1.39@4418.39,3454.06 ; v1(4705,2090) R2.2 ; v1(5022.69,3675.98) 5022.14,3676.53 4865.2,3676.53 MD1.38 4785.91,3677.09 4562.87,3454.06 4490.63,3454.06 MD1.39@4418.39,3454.06 ; BOOT.1@5266.4,1028.46 v1(5504.32,1028.46) 5814.02,1028.46 J4.1 J4.2 J4.3 J3.3 J3.2 J3.1
  Top Layer w19.68: J8.6 2970.89,208.23 2931.52,168.86 2931.52,132.05 2931.52,114.01 J8.8 J8.9 J8.10 J8.11 3207.11,114.01 3207.11,132.05 3207.11,168.86 J8.7@3167.74,208.23 ; 3129.32,208.46 3164.59,208.46 J8.7 ; R4.2 R4.2@3755.3,894.45 ; v1@3895.3,894.45 v1(3899.32,898.46)
  Top Layer w20: U1.3 1316.82,3434.9 1316.82,3310.96 v1(1319.32,3308.46) ; U1.5 1448.17,3331.81 D1.2@1745,3034.99 ; D1.2 D1.2@1745,3034.99 ; C2.2 1665,3595 v1(1600,3530) 1600,3325 1745,3180 D1.2@1745,3034.99
  Top Layer w28: J1.2 685.79,3271.57 C1.1 934.21,3345.79 v1(975,3305)
  Bottom Layer w15: D1.2 1758.06,3035 2535,3035 2684.04,2885.96 3330.61,2885.96 3384.64,2940 3965,2940 4035,2870 4035,2769.15 v1(3714.32,2448.46)
  Bottom Layer w20: v1(975,3305) 1069.32,3210.68 1069.32,3208.46 1219.32,3208.46 v1(1319.32,3308.46) ; D1.2 D1.2@1754.32,3025.67
  Bottom Layer w28: J2.2 1025,3608.43 1025,3355 v1(975,3305)
  other v1: 3124.32,338.46 3890,3675
IO4: J5.16 MD1.26 | length 1519.5
  Top Layer w10: MD1.26 4877.36,3064.37 4905.66,3064.37 4945,3025.03 4945,2760 J5.16
IO5: J5.13 MD1.29 | length 1369.5
  Top Layer w10: MD1.29 4877.36,3214.37 4905.66,3214.37 5235,2885.03 5235,2770 J5.13
IO16: J5.15 MD1.27 | length 1469.5
  Top Layer w10: MD1.27 4877.36,3114.37 4905.66,3114.37 5085,2935.03 5085,2720 J5.15
IO17: J5.14 MD1.28 | length 1419.5
  Top Layer w10: MD1.28 4877.36,3164.37 4905.66,3164.37 5155,2915.03 5155,2750 J5.14
IO18: J5.12 MD1.30 | length 1319.5
  Top Layer w10: MD1.30 4877.36,3264.37 4905.66,3264.37 5329.67,2840.36 5329.67,2775.33 J5.12
IO19: J5.11 MD1.31 | length 1277.8
  Top Layer w10: MD1.31 4877.36,3314.37 4905.66,3314.37 5670,2550.03 5670,2520.86 5745.86,2445 J5.11
IO21: J5.10 MD1.33 | length 1269.5
  Top Layer w10: MD1.33 4877.36,3414.37 4905.66,3414.37 5625,2695.03 5760,2560.03 J5.10
IO22: J5.9 MD1.36 | length 1329.5
  Top Layer w10: MD1.36 4886.3,3577.09 4903.58,3559.8 4910.23,3559.8 4919.02,3551.02 4919.02,3522.72 5580,2861.73 5580,2825 J5.9 J5.9@5750,2645
IO23: J5.8 MD1.37 | length 1269.5
  Top Layer w10: MD1.37 4877.36,3614.37 4905.66,3614.37 5760,2760.03 J5.8
IO25: J5.5 MD1.10 | length 1640.1
  Top Layer w10: MD1.10 4202.44,3220 v1(4420,3220)
  Bottom Layer w10: v1(4420,3220) 4785,3220 4950,3055 5750,3055 J5.5
IO26: J5.6 MD1.11 | length 1660.8
  Top Layer w10: MD1.11 4312.09,3177.09 4334.18,3155 v1(4345,3155)
  Bottom Layer w10: v1(4345,3155) 4350,3150 4750,3150 4955,2945 J5.6
IO27: J5.7 MD1.12 | length 1681.5
  Top Layer w10: MD1.12 4247.91,3127.09 v1(4280,3095)
  Bottom Layer w10: v1(4280,3095) 4720,3095 4960,2855 5750,2855 J5.7
IO32: J5.3 MD1.8 | length 1601.1
  Top Layer w10: MD1.8 4198.27,3330 v1(4300,3330)
  Bottom Layer w10: v1(4300,3330) 5485,3330 5565,3250 5755,3250 J5.3
IO33: J5.4 MD1.9 | length 1619.4
  Top Layer w10: MD1.9 4202.44,3270 v1(4340,3270)
  Bottom Layer w10: v1(4340,3270) 4985.21,3270 5110.21,3145 J5.4
IO34: J5.1 MD1.6 | length 1592.8
  Top Layer w10: MD1.6 4257.09,3427.09 v1(4300,3470)
  Bottom Layer w10: v1(4300,3470) 5735,3470 J5.1
IO35: J5.2 MD1.7 | length 1596.9
  Top Layer w10: MD1.7 4286.34,3377.09 4309.26,3400 v1(4320,3400)
  Bottom Layer w10: v1(4320,3400) 5580,3400 5635,3345 J5.2
NetBOOT_3: BOOT.3 MD1.25 | length 2092.6
  Top Layer w10: MD1.25 4864.65,2650.35 5089.32,2425.68 5089.32,1030.63 BOOT.3@5087.15,1028.46
NetBOOT_4: BOOT.4 R7.2 | length 260.4
  Top Layer w10: BOOT.4 5085.73,456.66 R7.2
NetC6_2: C6.2 R4.1 U2.22 | length 443.1
  Top Layer w10: U2.22@3343.17,916.26 3448.65,916.26 3541.44,823.46 C6.2 3557.19,823.46 3627.19,893.46 R4.1
NetDS1_1: ON.1 R10.1 | length 144.6
  Top Layer w15: ON.1 R10.1
NetEN_1: EN.1 R1.2 | length 352.6
  Top Layer w15: R1.2 3560,3560 3635,3485 3635,3392.91 EN.1
NetJ8_1: J8.1 R9.1 | length 362.6
  Top Layer w15: R9.1 2740,355 2893.45,355 3018.14,230.31 J8.1
NetJ8_2: J8.2 R5.1 | length 507
  Top Layer w10: v1(3269.32,393.46) 3274.59,393.46 3338.49,457.36 R5.1
  Top Layer w15: v1(3010,350) 3010,315 3043.73,281.27 J8.2
  Bottom Layer w10: 3031.54,368.46 3056.54,393.46 v1(3269.32,393.46)
NetJ8_3: J8.3 R6.2 | length 282.2
  Top Layer w10: R6.2 3085.14,457.36 R6.2@3101.8,440.71
  Top Layer w15: J8.3 3069.32,323.46 3069.32,452.36 R6.2
NetMD1_23: MD1.23 R3.1 | length 700.7
  Top Layer w10: R3.1@4385,2432.78 R3.1
  Top Layer w15: R3.1@4385,2432.78 4385,2615 4705,2935 MD1.23
NetMD1_24: MD1.24 R2.1 | length 578.9
  Top Layer w10: R2.1@4700,2449.61 R2.1 ; MD1.24@4745,2990 4747.28,2987.72 MD1.24
  Top Layer w15: R2.1@4700,2449.61 4700,2835 4755,2890 MD1.24
NetR8_1: R8.1 R9.2 U2.7 | length 743.2
  Top Layer w10: 2989.51,915.49 2991.81,917.8 U2.7
  Top Layer w15: R9.2 2730,685 2680,735 2680,814.53 R8.1 2674.53,823.94 2766.08,915.49 2989.51,915.49
TxD0->RxD: MD1.35 U2.23 | length 3455.6
  Top Layer w10: U2.23 3640.81,943.39 4249.72,1552.3 4249.72,3010.74 4293.98,3055 4381.88,3055 4604.06,3277.17 4604.06,3294.8 4823.63,3514.37 4851.93,3514.37 MD1.35
TxD->RxD0: MD1.34 U2.4 | length 4106.2
  Top Layer w10: v1(2770,985) 2914.18,985 2923.75,994.57 3073.92,994.57 U2.4@3075.46,993.03 ; v1(4810,2815) 4810,3450.74 4823.63,3464.37 4851.93,3464.37 MD1.34
  Bottom Layer w15: v1(2770,985) 2710,985 2645,1050 2645,1130 2820,1305 3300,1305 v1(4810,2815)
VCC: C1.2 J1.1 J2.1 U1.2 | length 1507.3
  Top Layer w20: 1068.69,3539.09 1207.27,3539.09 1220.14,3526.23 1220.14,3522.64 1233.69,3509.09 1237.7,3509.09 1247.39,3499.41 U1.2
  Top Layer w25: C1.2 973.8,3444.21 1068.69,3539.09
  Top Layer w28: J1.1 531.57,3468.43 ; J2.1 636.57,3573.43 531.57,3468.43 ; C1.2 555.79,3444.21 531.57,3468.43
Vout: D1.1 L1.1 U1.1 | length 2404.7
  Top Layer w20: U1.1 1180.46,3281.81 D1.1 714.32,3028.46 639.32,2953.46 639.32,2838.46 744.32,2733.46 2026.65,2733.46 L1.1
pads on no net: BOOT.2 EN.4 J8.4 MD1.4 MD1.5 MD1.13 MD1.14 MD1.16 MD1.17 MD1.18 MD1.19 MD1.20 MD1.21 MD1.22 MD1.32 U1.6 U2.2 U2.3 U2.5 U2.6 U2.8 U2.9 U2.10 U2.11 U2.12 U2.17 U2.18 U2.19 U2.20 U2.21 U2.24 U2.25 U2.26 U2.27

## Polygon pours and split planes (outlines as drawn)
GND on Top Layer "GND" (solid, pour order 0): 1575,3640 1580,3635 1580,115 4480,115 4790,425 5985,425 5985,1665 6000,1680 5985,1695 4980,1695 4980,3680 4960,3700 1595,3700
3V3 on Bottom Layer "GND" (solid, pour order 1): 1665,3615 1665,125 1695,95 5790,95 4175,1710 4175,3639.37

## Other copper
Top Layer:
  pour cut-out: 4610,2925 4610,2715 4895,2715 4895,2920
Bottom Layer:
  pour cut-out: 1004.99,3423.46 1004.99,3289.14 1024.32,3308.46 1684.32,3308.46 1684.32,3423.46

## Silkscreen, mask and mechanical layers (free items; w line width, h text height)
Top Overlay:
  text "+" at 450,3755 h60
  text "-" at 955,3755.01 h60
  text "H-Bridge" at 351.67,3690 h40 r90
  text "+" at 225,3605 h60
  text "IO34" at 5875,3445 h30
  text "IO35" at 5869.48,3347.09 h30
  text "IO32" at 5869.48,3257.09 h30
  text "IO33" at 5874.48,3152.09 h30
  text "-" at 230,3110.01 h60
  text "IO25" at 5869.48,3052.09 h30
  text "Input" at 85,3005 h40
  text "Power" at 95,2955 h40
  text "IO26" at 5869.48,2947.09 h30
  text "IO27" at 5864.48,2852.09 h30
  text "IO23" at 5864.48,2752.09 h30
  text "IO22" at 5864.48,2652.09 h30
  text "IO21" at 5864.48,2547.09 h30
  text "IO19" at 5859.48,2447.09 h30
  text "IO18" at 5859.48,2342.09 h30
  text "IO5" at 5859.48,2247.09 h30
  text "IO17" at 5859.48,2142.09 h30
  text "IO16" at 5864.48,2052.09 h30
  text "IO4" at 5864.48,1942.09 h30
  text "Gnd" at 5740,810 h60 r270
  text "3V3" at 5395,270 h60
Mechanical 1:
  the board outline again, w47.24

## Text inside footprints (layer, text, board x,y; h text height)
J8: Mechanical 1 "PCB EDGE" at 2785.85,44.29 h11.81